# EAGLE board Contador até 99 (EAGLE 9.7.0)

Size 253.23 x 59.69 mm. Coordinates in mm from the lower left corner, seen from the top.
Outline: 0,0 253.23,0 253.23,59.69 0,59.69 0,0
Copper layers (1*16): Top 0.035mm / dielectric 1.5mm / Bottom 0.035mm
Design rules "default": minimum track width 6mil, minimum drill 0.35mm, track to track 6mil, track to pad 6mil, pad to pad 6mil, via to via 6mil, smd to smd 6mil, copper to edge 40mil, drill to drill 6mil, minimum pad ring 10mil, minimum via ring 8mil, stop-mask expansion 4mil, vias tented up to drill 0mil, thermal gap 10mil

## Footprints (pad centres in the part's own frame; a part is rotated, then mirrored left to right if it is on the bottom)
LEDRD254W60D565H860B = drill 0.981 pad 1.581: 1 -1.27,0; 2 1.27,0
7SEG-13 = drill 0.813 long: 1 -5.08,-7.62; 2 -2.54,-7.62; 3 0,-7.62; 4 2.54,-7.62; 5 5.08,-7.62; 6 5.08,7.62; 7 2.54,7.62; 8 0,7.62; 9 -2.54,7.62; 10 -5.08,7.62
RESAD1016W63L850D250B = drill 0.83 pad 1.43: 1 -5.08,0; 2 5.08,0
SWITCH-MOMENTARY-PTH-6.5MM = drill 1.016 pad 1.88: 1 -3.251,2.261; 2 3.251,2.261; 3 -3.251,-2.261; 4 3.251,-2.261
TO92 = drill 0.813 octagon: 1 -1.27,0; 2 0,1.905; 3 1.27,0
ARDUINO-UNO-R3-SHIELD = drill 1.016 pad 1.88: 3.3V 24.13,-2.54; 5V 24.13,0; A0 24.13,12.7; A1 24.13,15.24; A2 24.13,17.78; A3 24.13,20.32; A4 24.13,22.86; A5 24.13,25.4; AREF -24.13,-13.97; D2 -24.13,20.32; D3 -24.13,17.78; D4 -24.13,15.24; D5 -24.13,12.7; D6 -24.13,10.16; D7 -24.13,7.62; D8 -24.13,3.81; D9 -24.13,1.27; D10 -24.13,-1.27; D11 -24.13,-3.81; D12 -24.13,-6.35; D13 -24.13,-8.89; GND@0 24.13,2.54; GND@1 24.13,5.08; GND@2 -24.13,-11.43; IOREF 24.13,-7.62; NC 24.13,-10.16; RES 24.13,-5.08; RX -24.13,25.4; SCL -24.13,-19.05; SDA -24.13,-16.51; TX -24.13,22.86; VIN 24.13,7.62

## Placement (x,y rotation side)
D1  RED  [LEDRD254W60D565H860B]  245.63,35.33 180 top
DIGIT1  7SEG-CK  [7SEG-13]  140.22,30.25 0 top
DIGIT2  7SEG-CK  [7SEG-13]  152.92,30.25 0 top
R1  220  [RESAD1016W63L850D250B]  109.74,27.71 90 top
R2  1k  [RESAD1016W63L850D250B]  203.72,32.79 0 top
R3  220  [RESAD1016W63L850D250B]  112.28,27.71 90 top
R4  220  [RESAD1016W63L850D250B]  114.82,27.71 90 top
R5  220  [RESAD1016W63L850D250B]  117.36,27.71 90 top
R6  220  [RESAD1016W63L850D250B]  119.9,27.71 90 top
R7  220  [RESAD1016W63L850D250B]  122.44,27.71 90 top
R8  220  [RESAD1016W63L850D250B]  124.98,27.71 90 top
R9  220  [RESAD1016W63L850D250B]  168.16,27.71 90 top
R10  220  [RESAD1016W63L850D250B]  170.7,27.71 90 top
R11  220  [RESAD1016W63L850D250B]  173.24,27.71 90 top
R12  220  [RESAD1016W63L850D250B]  175.78,27.71 90 top
R13  220  [RESAD1016W63L850D250B]  178.32,27.71 90 top
R14  220  [RESAD1016W63L850D250B]  180.86,27.71 90 top
R15  220  [RESAD1016W63L850D250B]  183.4,27.71 90 top
R16  1k  [RESAD1016W63L850D250B]  203.72,15.01 0 top
R17  1k  [RESAD1016W63L850D250B]  246.9,27.71 270 top
S1  SWITCH_MOMENTARY  [SWITCH-MOMENTARY-PTH-6.5MM]  94.5,21.36 90 top
S2  SWITCH_MOMENTARY  [SWITCH-MOMENTARY-PTH-6.5MM]  226.58,28.98 90 top
S3  SWITCH_MOMENTARY  [SWITCH-MOMENTARY-PTH-6.5MM]  234.2,28.98 90 top
T1  NPN  [TO92]  198.64,37.87 0 top
T2  NPN  [TO92]  198.64,20.09 0 top
U1  ARDUINO-UNO-R3-SHIELD  [ARDUINO-UNO-R3-SHIELD]  47.88,29.84 270 top

## Library data of the parts
D1 = Tinkercad; CATEGORY: Opto-Electronic; SUB-CATEGORY: LED; VALUE: LED_RED
DIGIT1 DIGIT2 = Tinkercad; CATEGORY: Opto-Electronic; SUB-CATEGORY: Display; TYPE: 7-Segment
R1-R17 S1-S3 U1 = Tinkercad
T1 T2 = Tinkercad; CATEGORY: Transistor; SUB-CATEGORY: BJT; TYPE: NPN

## Nets
D1_A: D1.1 R17.1
DIGIT1_A: DIGIT1.7 R1.1
DIGIT1_B: DIGIT1.6 R3.1
DIGIT1_C: DIGIT1.4 R4.1
DIGIT1_CK1: DIGIT1.3 T2.1
DIGIT1_D: DIGIT1.2 R5.1
DIGIT1_E: DIGIT1.1 R6.1
DIGIT1_F: DIGIT1.9 R7.1
DIGIT1_G: DIGIT1.10 R8.1
DIGIT2_A: DIGIT2.7 R9.1
DIGIT2_B: DIGIT2.6 R10.1
DIGIT2_C: DIGIT2.4 R11.1
DIGIT2_CK2: DIGIT2.8 T1.1
DIGIT2_D: DIGIT2.2 R12.1
DIGIT2_E: DIGIT2.1 R13.1
DIGIT2_F: DIGIT2.9 R14.1
DIGIT2_G: DIGIT2.10 R15.1
T1_B: R2.1 T1.2
T2_B: R16.1 T2.2
U1_D2: R1.2 R9.2 U1.D2
U1_D3: R3.2 R10.2 U1.D3
U1_D4: R4.2 R11.2 U1.D4
U1_D5: R5.2 R12.2 U1.D5
U1_D6: R6.2 R13.2 U1.D6
U1_D7: R7.2 R14.2 U1.D7
U1_D8: R8.2 R15.2 U1.D8
U1_D9: R16.2 U1.D9
U1_D10: R2.2 U1.D10
U1_D11: S1.1 S1.2 U1.D11
U1_D13: R17.2 U1.D13
U1_GND: D1.2 S1.3 S1.4 S2.3 S2.4 S3.3 S3.4 T1.3 T2.3 U1.GND@0 U1.GND@1 U1.GND@2
U1_RX: S2.1 S2.2 U1.RX
U1_TX: S3.1 S3.2 U1.TX

## Tracks (layer width: path | path; a pad name or v marks a point on that pad's centre or on a via)
D1_A  (1 unrouted)
DIGIT1_A  (1 unrouted)
DIGIT1_B  (1 unrouted)
DIGIT1_C  (1 unrouted)
DIGIT1_CK1  (1 unrouted)
DIGIT1_D  (1 unrouted)
DIGIT1_E  (1 unrouted)
DIGIT1_F  (1 unrouted)
DIGIT1_G  (1 unrouted)
DIGIT2_A  (1 unrouted)
DIGIT2_B  (1 unrouted)
DIGIT2_C  (1 unrouted)
DIGIT2_CK2  (1 unrouted)
DIGIT2_D  (1 unrouted)
DIGIT2_E  (1 unrouted)
DIGIT2_F  (1 unrouted)
DIGIT2_G  (1 unrouted)
T1_B  (1 unrouted)
T2_B  (1 unrouted)
U1_D2  (2 unrouted)
U1_D3  (2 unrouted)
U1_D4  (2 unrouted)
U1_D5  (2 unrouted)
U1_D6  (2 unrouted)
U1_D7  (2 unrouted)
U1_D8  (2 unrouted)
U1_D9  (1 unrouted)
U1_D10  (1 unrouted)
U1_D11  (2 unrouted)
U1_D13  (1 unrouted)
U1_GND  (11 unrouted)
U1_RX  (2 unrouted)
U1_TX  (2 unrouted)